# Altium PCB PCB2.PcbDoc (part 2 of 2)
Units mm, origin at the board's own origin, x right, y up, seen from the top; angles counter-clockwise.
Board outline 102 x 102 mm, 2 copper layers (Top Layer, Bottom Layer); 216 components, 12 nets, 485 pads, 0 vias.
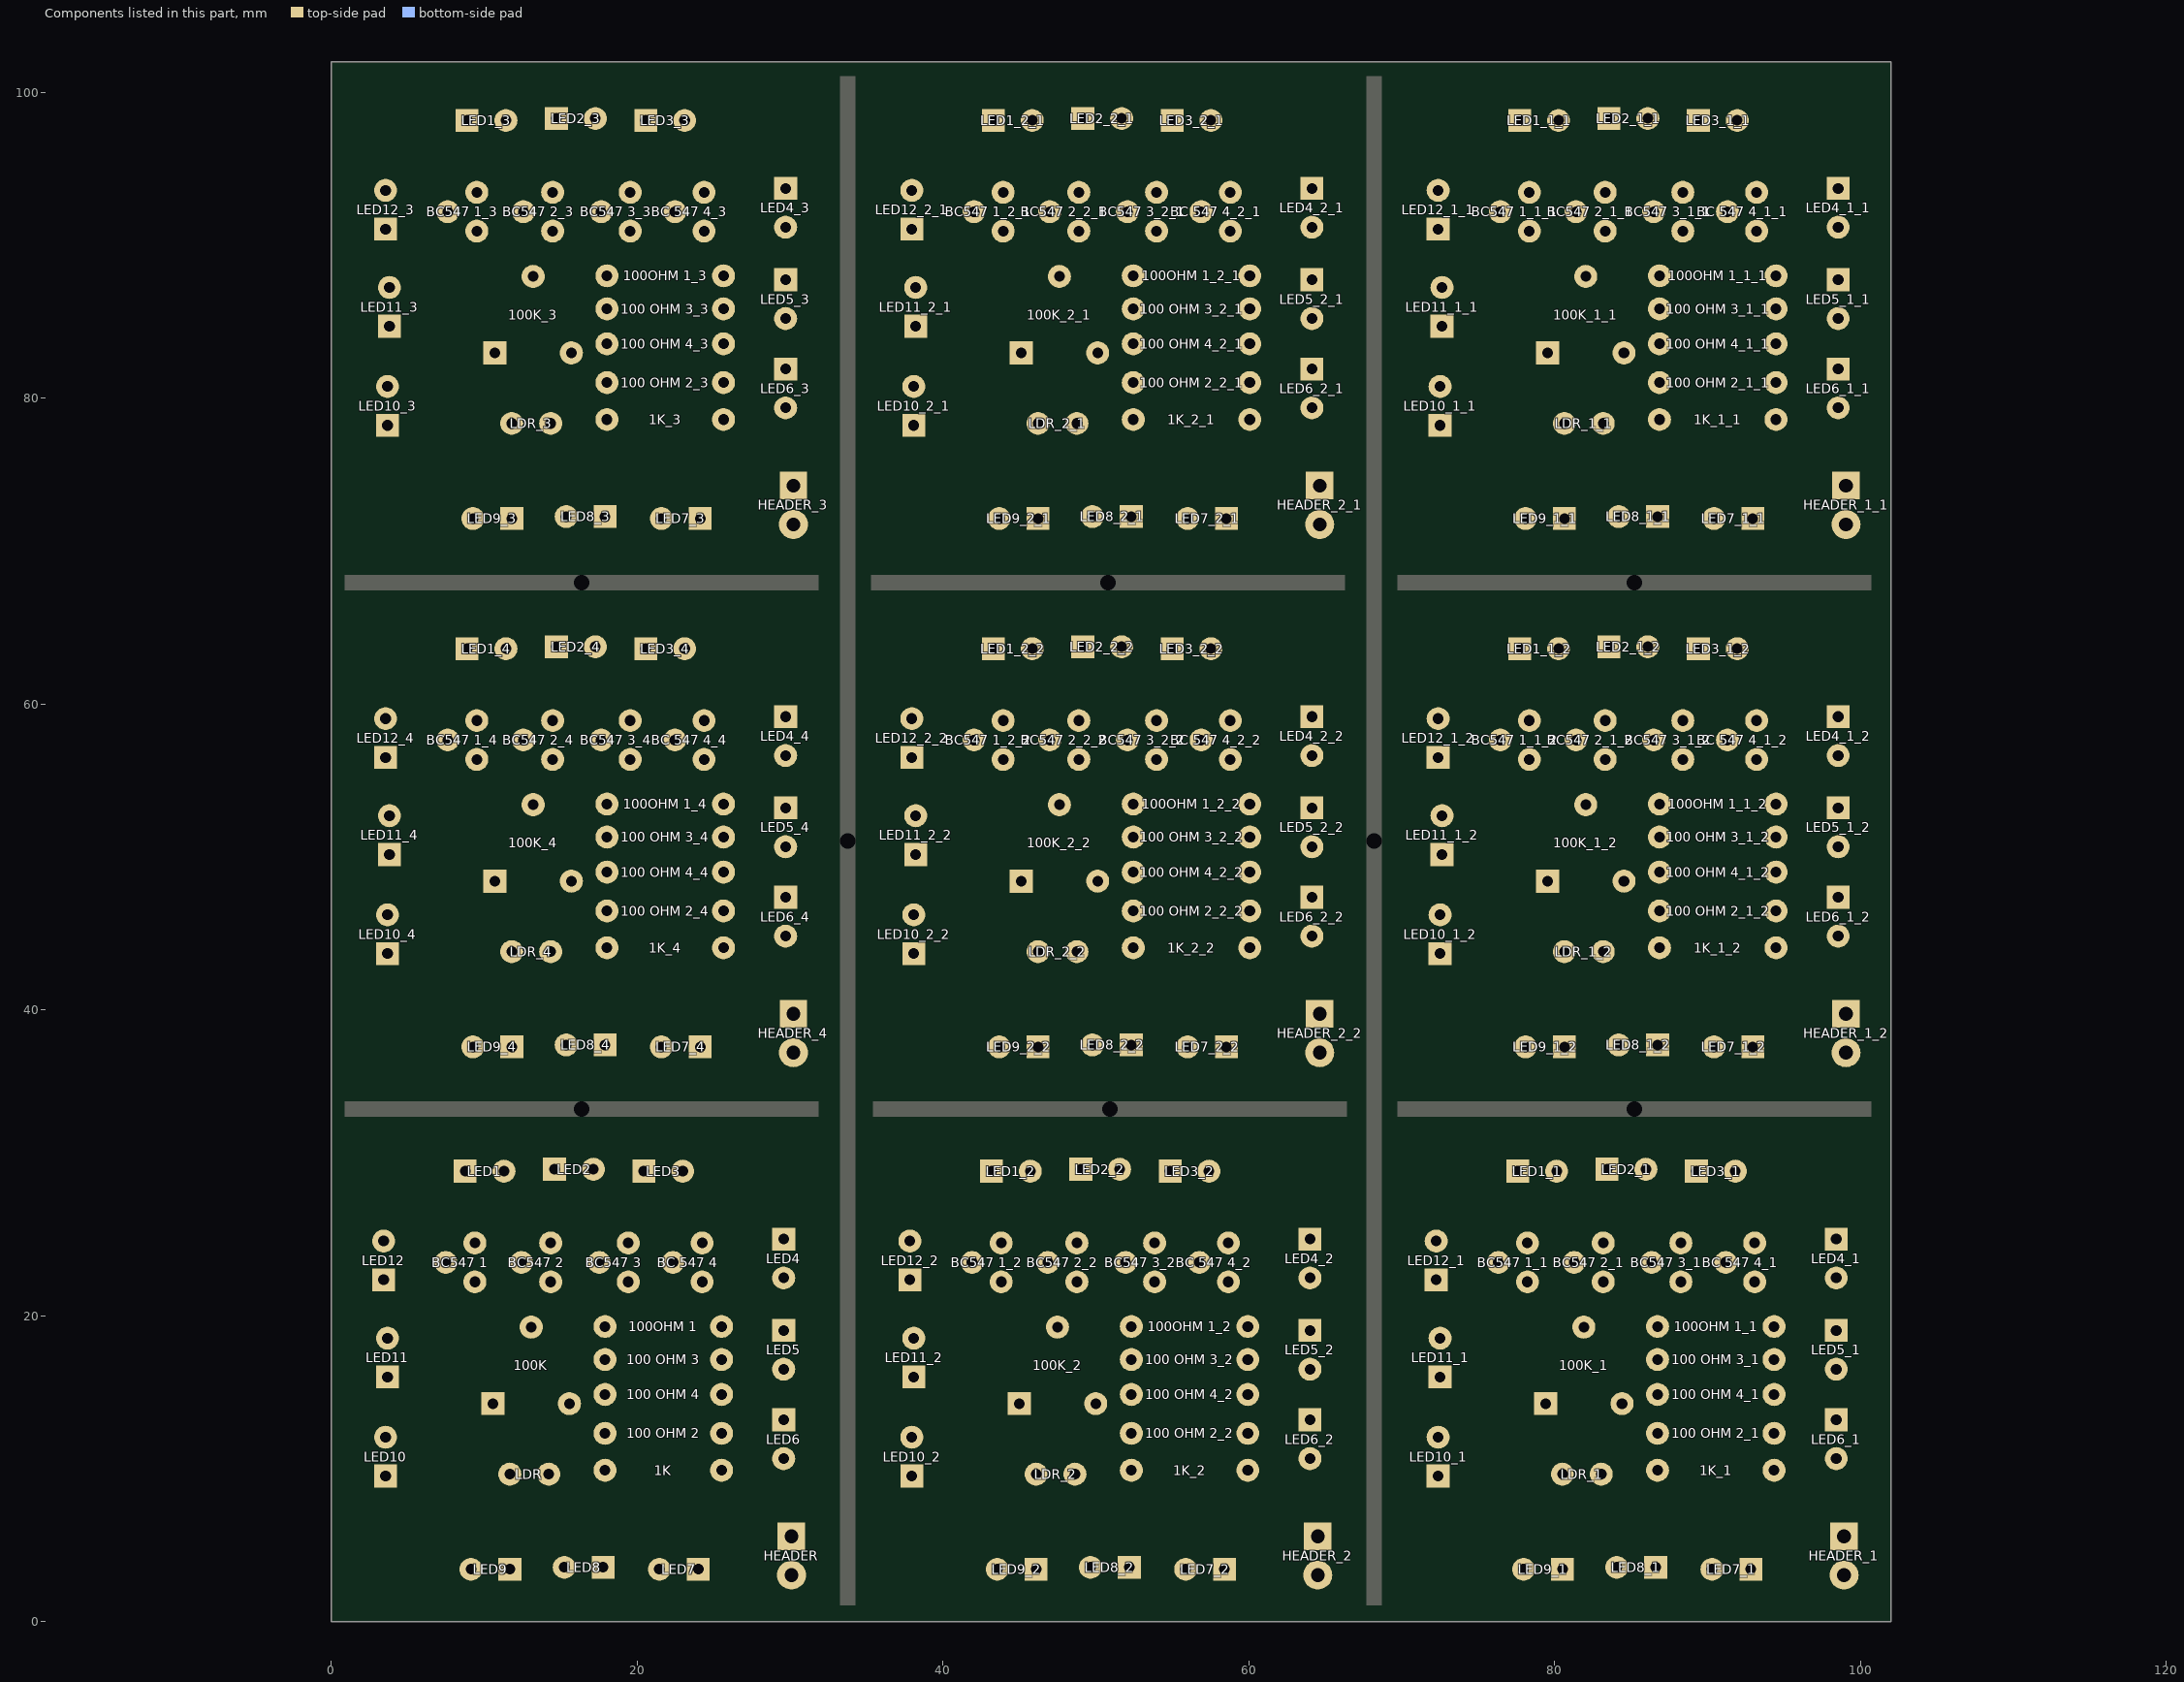
[diagram p2: the components of this part, seen from the top]

## Nets (pads, with @x,y where several pads share a name; then routed paths per layer and width w, separated by ;. In a path a pad name is that pad's centre, name@x,y a point inside that pad or via, vN(x,y) a via of type N, cw(c..) or ccw(c..) an arc to the next point about the centre after c; other vN are vias at no path point) (continued)
copper on no net: | length 3247.5
  Top Layer w0.508: 3.556,56.515 5.182,54.889 5.182,51.537 3.81,50.165 5.055,48.92 5.055,45.06 3.683,43.688 ; 3.556,91.059 5.182,89.433 5.182,86.081 3.81,84.709 5.055,83.464 5.055,79.604 3.683,78.232 ; 3.683,46.228 2.54,47.371 2.54,51.435 3.81,52.705 2.286,54.229 2.286,57.785 3.556,59.055 3.556,63.754 5.334,65.532 24.13,65.532 25.4,64.262 25.4,62.103 24.232,60.935 22.098,60.935 21.209,60.046 21.209,56.896 21.717,56.388 24.384,56.388 ; 3.683,80.772 2.54,81.915 2.54,85.979 3.81,87.249 2.286,88.773 2.286,92.329 3.556,93.599 3.556,98.298 5.334,100.076 24.13,100.076 25.4,98.806 25.4,96.647 24.232,95.479 22.098,95.479 21.209,94.59 21.209,91.44 21.717,90.932 24.384,90.932 ; 9.525,56.388 11.43,58.293 11.43,63.627 ; 9.525,58.928 6.985,58.928 6.35,58.293 6.35,49.276 11.811,43.815 ; 9.525,90.932 11.43,92.837 11.43,98.171 ; 9.525,93.472 6.985,93.472 6.35,92.837 6.35,83.82 11.811,78.359 ; 10.708,48.427 11.129,48.006 11.256,48.006 13.081,46.181 13.081,37.338 14.605,35.814 25.019,35.814 25.654,36.449 25.654,44.069 ; 10.708,82.971 11.129,82.55 11.256,82.55 13.081,80.725 13.081,71.882 14.605,70.358 25.019,70.358 25.654,70.993 25.654,78.613 ; 12.573,57.658 12.573,54.062 13.208,53.427 13.208,50.927 15.708,48.427 15.708,45.172 14.351,43.815 ; 12.573,92.202 12.573,88.606 13.208,87.971 13.208,85.471 15.708,82.971 15.708,79.716 14.351,78.359 ; 18.034,44.069 18.034,46.482 18.034,49.022 18.034,51.308 ; 18.034,53.467 16.383,55.118 16.383,59.436 20.574,63.627 ; 18.034,78.613 18.034,81.026 18.034,83.566 18.034,85.852 ; 18.034,88.011 16.383,89.662 16.383,93.98 20.574,98.171 ; 19.558,56.388 19.558,39.624 21.59,37.592 ; 19.558,90.932 19.558,74.168 21.59,72.136 ; 24.13,37.592 24.13,49.784 25.654,51.308 ; 24.13,72.136 24.13,84.328 25.654,85.852 ; 29.718,44.831 30.988,46.101 30.988,49.403 29.718,50.673 30.988,51.943 30.988,55.372 29.718,56.642 ; 29.718,47.371 28.448,48.641 28.448,51.943 29.718,53.213 28.448,54.483 28.448,57.912 29.718,59.182 ; 29.718,79.375 30.988,80.645 30.988,83.947 29.718,85.217 30.988,86.487 30.988,89.916 29.718,91.186 ; 29.718,81.915 28.448,83.185 28.448,86.487 29.718,87.757 28.448,89.027 28.448,92.456 29.718,93.726 ; 37.846,22.352 39.472,20.726 39.472,17.374 38.1,16.002 39.345,14.757 39.345,10.897 37.973,9.525 ; 37.973,12.065 36.83,13.208 36.83,17.272 38.1,18.542 36.576,20.066 36.576,23.622 37.846,24.892 37.846,29.591 39.624,31.369 58.42,31.369 59.69,30.099 59.69,27.94 58.522,26.772 56.388,26.772 55.499,25.883 55.499,22.733 56.007,22.225 58.674,22.225 ; 37.973,56.515 39.599,54.889 39.599,51.537 38.227,50.165 39.472,48.92 39.472,45.06 38.1,43.688 ; 37.973,91.059 39.599,89.433 39.599,86.081 38.227,84.709 39.472,83.464 39.472,79.604 38.1,78.232 ; 38.1,46.228 36.957,47.371 36.957,51.435 38.227,52.705 36.703,54.229 36.703,57.785 37.973,59.055 37.973,63.754 39.751,65.532 58.547,65.532 59.817,64.262 59.817,62.103 58.649,60.935 56.515,60.935 55.626,60.046 55.626,56.896 56.134,56.388 58.801,56.388 ; 38.1,80.772 36.957,81.915 36.957,85.979 38.227,87.249 36.703,88.773 36.703,92.329 37.973,93.599 37.973,98.298 39.751,100.076 58.547,100.076 59.817,98.806 59.817,96.647 58.649,95.479 56.515,95.479 55.626,94.59 55.626,91.44 56.134,90.932 58.801,90.932 ; 43.815,22.225 45.72,24.13 45.72,29.464 ; 43.815,24.765 41.275,24.765 40.64,24.13 40.64,15.113 46.101,9.652 ; 43.942,56.388 45.847,58.293 45.847,63.627 ; 43.942,58.928 41.402,58.928 40.767,58.293 40.767,49.276 46.228,43.815 ; 43.942,90.932 45.847,92.837 45.847,98.171 ; 43.942,93.472 41.402,93.472 40.767,92.837 40.767,83.82 46.228,78.359 ; 44.998,14.264 45.419,13.843 45.546,13.843 47.371,12.018 47.371,3.175 48.895,1.651 59.309,1.651 59.944,2.286 59.944,9.906 ; 45.125,48.427 45.546,48.006 45.673,48.006 47.498,46.181 47.498,37.338 49.022,35.814 59.436,35.814 60.071,36.449 60.071,44.069 ; 45.125,82.971 45.546,82.55 45.673,82.55 47.498,80.725 47.498,71.882 49.022,70.358 59.436,70.358 60.071,70.993 60.071,78.613 ; 46.863,23.495 46.863,19.899 47.498,19.264 47.498,16.764 49.998,14.264 49.998,11.009 48.641,9.652 ; 46.99,57.658 46.99,54.062 47.625,53.427 47.625,50.927 50.125,48.427 50.125,45.172 48.768,43.815 ; 46.99,92.202 46.99,88.606 47.625,87.971 47.625,85.471 50.125,82.971 50.125,79.716 48.768,78.359 ; 52.324,9.906 52.324,12.319 52.324,14.859 52.324,17.145 ; 52.324,19.304 50.673,20.955 50.673,25.273 54.864,29.464 ; 52.451,44.069 52.451,46.482 52.451,49.022 52.451,51.308 ; 52.451,53.467 50.8,55.118 50.8,59.436 54.991,63.627 ; 52.451,78.613 52.451,81.026 52.451,83.566 52.451,85.852 ; 52.451,88.011 50.8,89.662 50.8,93.98 54.991,98.171 ; 53.848,22.225 53.848,5.461 55.88,3.429 ; 53.975,56.388 53.975,39.624 56.007,37.592 ; 53.975,90.932 53.975,74.168 56.007,72.136 ; 58.42,3.429 58.42,15.621 59.944,17.145 ; 58.547,37.592 58.547,49.784 60.071,51.308 ; 58.547,72.136 58.547,84.328 60.071,85.852 ; 64.008,10.668 65.278,11.938 65.278,15.24 64.008,16.51 65.278,17.78 65.278,21.209 64.008,22.479 ; 64.008,13.208 62.738,14.478 62.738,17.78 64.008,19.05 62.738,20.32 62.738,23.749 64.008,25.019 ; 64.135,44.831 65.405,46.101 65.405,49.403 64.135,50.673 65.405,51.943 65.405,55.372 64.135,56.642 ; 64.135,47.371 62.865,48.641 62.865,51.943 64.135,53.213 62.865,54.483 62.865,57.912 64.135,59.182 ; 64.135,79.375 65.405,80.645 65.405,83.947 64.135,85.217 65.405,86.487 65.405,89.916 64.135,91.186 ; 64.135,81.915 62.865,83.185 62.865,86.487 64.135,87.757 62.865,89.027 62.865,92.456 64.135,93.726 ; 72.263,22.352 73.889,20.726 73.889,17.374 72.517,16.002 73.762,14.757 73.762,10.897 72.39,9.525 ; 72.39,12.065 71.247,13.208 71.247,17.272 72.517,18.542 70.993,20.066 70.993,23.622 72.263,24.892 72.263,29.591 74.041,31.369 92.837,31.369 94.107,30.099 94.107,27.94 92.939,26.772 90.805,26.772 89.916,25.883 89.916,22.733 90.424,22.225 93.091,22.225 ; 72.39,56.515 74.016,54.889 74.016,51.537 72.644,50.165 73.889,48.92 73.889,45.06 72.517,43.688 ; 72.39,91.059 74.016,89.433 74.016,86.081 72.644,84.709 73.889,83.464 73.889,79.604 72.517,78.232 ; 72.517,46.228 71.374,47.371 71.374,51.435 72.644,52.705 71.12,54.229 71.12,57.785 72.39,59.055 72.39,63.754 74.168,65.532 92.964,65.532 94.234,64.262 94.234,62.103 93.066,60.935 90.932,60.935 90.043,60.046 90.043,56.896 90.551,56.388 93.218,56.388 ; 72.517,80.772 71.374,81.915 71.374,85.979 72.644,87.249 71.12,88.773 71.12,92.329 72.39,93.599 72.39,98.298 74.168,100.076 92.964,100.076 94.234,98.806 94.234,96.647 93.066,95.479 90.932,95.479 90.043,94.59 90.043,91.44 90.551,90.932 93.218,90.932 ; 78.232,22.225 80.137,24.13 80.137,29.464 ; 78.232,24.765 75.692,24.765 75.057,24.13 75.057,15.113 80.518,9.652 ; 78.359,56.388 80.264,58.293 80.264,63.627 ; 78.359,58.928 75.819,58.928 75.184,58.293 75.184,49.276 80.645,43.815 ; 78.359,90.932 80.264,92.837 80.264,98.171 ; 78.359,93.472 75.819,93.472 75.184,92.837 75.184,83.82 80.645,78.359 ; 79.415,14.264 79.836,13.843 79.963,13.843 81.788,12.018 81.788,3.175 83.312,1.651 93.726,1.651 94.361,2.286 94.361,9.906 ; 79.542,48.427 79.963,48.006 80.09,48.006 81.915,46.181 81.915,37.338 83.439,35.814 93.853,35.814 94.488,36.449 94.488,44.069 ; 79.542,82.971 79.963,82.55 80.09,82.55 81.915,80.725 81.915,71.882 83.439,70.358 93.853,70.358 94.488,70.993 94.488,78.613 ; 81.28,23.495 81.28,19.899 81.915,19.264 81.915,16.764 84.415,14.264 84.415,11.009 83.058,9.652 ; 81.407,57.658 81.407,54.062 82.042,53.427 82.042,50.927 84.542,48.427 84.542,45.172 83.185,43.815 ; 81.407,92.202 81.407,88.606 82.042,87.971 82.042,85.471 84.542,82.971 84.542,79.716 83.185,78.359 ; 86.741,9.906 86.741,12.319 86.741,14.859 86.741,17.145 ; 86.741,19.304 85.09,20.955 85.09,25.273 89.281,29.464 ; 86.868,44.069 86.868,46.482 86.868,49.022 86.868,51.308 ; 86.868,53.467 85.217,55.118 85.217,59.436 89.408,63.627 ; 86.868,78.613 86.868,81.026 86.868,83.566 86.868,85.852 ; 86.868,88.011 85.217,89.662 85.217,93.98 89.408,98.171 ; 88.265,22.225 88.265,5.461 90.297,3.429 ; 88.392,56.388 88.392,39.624 90.424,37.592 ; 88.392,90.932 88.392,74.168 90.424,72.136 ; 92.837,3.429 92.837,15.621 94.361,17.145 ; 92.964,37.592 92.964,49.784 94.488,51.308 ; 92.964,72.136 92.964,84.328 94.488,85.852 ; 98.425,10.668 99.695,11.938 99.695,15.24 98.425,16.51 99.695,17.78 99.695,21.209 98.425,22.479 ; 98.425,13.208 97.155,14.478 97.155,17.78 98.425,19.05 97.155,20.32 97.155,23.749 98.425,25.019 ; 98.552,44.831 99.822,46.101 99.822,49.403 98.552,50.673 99.822,51.943 99.822,55.372 98.552,56.642 ; 98.552,47.371 97.282,48.641 97.282,51.943 98.552,53.213 97.282,54.483 97.282,57.912 98.552,59.182 ; 98.552,79.375 99.822,80.645 99.822,83.947 98.552,85.217 99.822,86.487 99.822,89.916 98.552,91.186 ; 98.552,81.915 97.282,83.185 97.282,86.487 98.552,87.757 97.282,89.027 97.282,92.456 98.552,93.726
  Bottom Layer w0.508: 3.81,50.165 6.833,47.142 16.915,47.142 17.525,47.752 24.384,47.752 25.654,49.022 ; 3.81,84.709 6.833,81.686 16.915,81.686 17.525,82.296 24.384,82.296 25.654,83.566 ; 7.62,57.658 12.573,57.658 17.653,57.658 22.479,57.658 ; 7.62,92.202 12.573,92.202 17.653,92.202 22.479,92.202 ; 8.89,63.627 10.262,62.255 13.233,62.255 14.732,63.754 16.104,62.382 19.329,62.382 20.574,63.627 ; 8.89,98.171 10.262,96.799 13.233,96.799 14.732,98.298 16.104,96.926 19.329,96.926 20.574,98.171 ; 9.271,37.592 10.541,36.322 13.97,36.322 15.367,37.719 17.272,35.814 19.812,35.814 21.59,37.592 ; 9.271,72.136 10.541,70.866 13.97,70.866 15.367,72.263 17.272,70.358 19.812,70.358 21.59,72.136 ; 9.525,58.928 14.478,58.928 19.558,58.928 24.384,58.928 ; 9.525,93.472 14.478,93.472 19.558,93.472 24.384,93.472 ; 11.43,63.627 12.903,65.1 15.926,65.1 17.272,63.754 18.491,64.973 21.768,64.973 23.114,63.627 ; 11.43,98.171 12.903,99.644 15.926,99.644 17.272,98.298 18.491,99.517 21.768,99.517 23.114,98.171 ; 11.811,37.592 13.31,39.091 16.535,39.091 17.907,37.719 19.152,38.964 22.758,38.964 24.13,37.592 ; 11.811,43.815 15.367,40.259 27.178,40.259 30.226,37.211 ; 11.811,72.136 13.31,73.635 16.535,73.635 17.907,72.263 19.152,73.508 22.758,73.508 24.13,72.136 ; 11.811,78.359 15.367,74.803 27.178,74.803 30.226,71.755 ; 14.478,56.388 15.748,55.118 28.194,55.118 29.718,56.642 ; 14.478,90.932 15.748,89.662 28.194,89.662 29.718,91.186 ; 18.034,44.069 20.549,41.554 28.423,41.554 30.226,39.751 ; 18.034,51.308 20.193,53.467 25.654,53.467 ; 18.034,78.613 20.549,76.098 28.423,76.098 30.226,74.295 ; 18.034,85.852 20.193,88.011 25.654,88.011 ; 25.654,46.482 26.543,47.371 29.718,47.371 ; 25.654,81.026 26.543,81.915 29.718,81.915 ; 38.1,16.002 41.123,12.979 51.205,12.979 51.815,13.589 58.674,13.589 59.944,14.859 ; 38.227,50.165 41.25,47.142 51.332,47.142 51.942,47.752 58.801,47.752 60.071,49.022 ; 38.227,84.709 41.25,81.686 51.332,81.686 51.942,82.296 58.801,82.296 60.071,83.566 ; 41.91,23.495 46.863,23.495 51.943,23.495 56.769,23.495 ; 42.037,57.658 46.99,57.658 52.07,57.658 56.896,57.658 ; 42.037,92.202 46.99,92.202 52.07,92.202 56.896,92.202 ; 43.18,29.464 44.552,28.092 47.523,28.092 49.022,29.591 50.394,28.219 53.619,28.219 54.864,29.464 ; 43.307,63.627 44.679,62.255 47.65,62.255 49.149,63.754 50.521,62.382 53.746,62.382 54.991,63.627 ; 43.307,98.171 44.679,96.799 47.65,96.799 49.149,98.298 50.521,96.926 53.746,96.926 54.991,98.171 ; 43.561,3.429 44.831,2.159 48.26,2.159 49.657,3.556 51.562,1.651 54.102,1.651 55.88,3.429 ; 43.688,37.592 44.958,36.322 48.387,36.322 49.784,37.719 51.689,35.814 54.229,35.814 56.007,37.592 ; 43.688,72.136 44.958,70.866 48.387,70.866 49.784,72.263 51.689,70.358 54.229,70.358 56.007,72.136 ; 43.815,24.765 48.768,24.765 53.848,24.765 58.674,24.765 ; 43.942,58.928 48.895,58.928 53.975,58.928 58.801,58.928 ; 43.942,93.472 48.895,93.472 53.975,93.472 58.801,93.472 ; 45.72,29.464 47.193,30.937 50.216,30.937 51.562,29.591 52.781,30.81 56.058,30.81 57.404,29.464 ; 45.847,63.627 47.32,65.1 50.343,65.1 51.689,63.754 52.908,64.973 56.185,64.973 57.531,63.627 ; 45.847,98.171 47.32,99.644 50.343,99.644 51.689,98.298 52.908,99.517 56.185,99.517 57.531,98.171 ; 46.101,3.429 47.6,4.928 50.825,4.928 52.197,3.556 53.442,4.801 57.048,4.801 58.42,3.429 ; 46.101,9.652 49.657,6.096 61.468,6.096 64.516,3.048 ; 46.228,37.592 47.727,39.091 50.952,39.091 52.324,37.719 53.569,38.964 57.175,38.964 58.547,37.592 ; 46.228,43.815 49.784,40.259 61.595,40.259 64.643,37.211 ; 46.228,72.136 47.727,73.635 50.952,73.635 52.324,72.263 53.569,73.508 57.175,73.508 58.547,72.136 ; 46.228,78.359 49.784,74.803 61.595,74.803 64.643,71.755 ; 48.768,22.225 50.038,20.955 62.484,20.955 64.008,22.479 ; 48.895,56.388 50.165,55.118 62.611,55.118 64.135,56.642 ; 48.895,90.932 50.165,89.662 62.611,89.662 64.135,91.186 ; 52.324,9.906 54.839,7.391 62.713,7.391 64.516,5.588 ; 52.324,17.145 54.483,19.304 59.944,19.304 ; 52.451,44.069 54.966,41.554 62.84,41.554 64.643,39.751 ; 52.451,51.308 54.61,53.467 60.071,53.467 ; 52.451,78.613 54.966,76.098 62.84,76.098 64.643,74.295 ; 52.451,85.852 54.61,88.011 60.071,88.011 ; 59.944,12.319 60.833,13.208 64.008,13.208 ; 60.071,46.482 60.96,47.371 64.135,47.371 ; 60.071,81.026 60.96,81.915 64.135,81.915 ; 72.517,16.002 75.54,12.979 85.622,12.979 86.232,13.589 93.091,13.589 94.361,14.859 ; 72.644,50.165 75.667,47.142 85.749,47.142 86.359,47.752 93.218,47.752 94.488,49.022 ; 72.644,84.709 75.667,81.686 85.749,81.686 86.359,82.296 93.218,82.296 94.488,83.566 ; 76.327,23.495 81.28,23.495 86.36,23.495 91.186,23.495 ; 76.454,57.658 81.407,57.658 86.487,57.658 91.313,57.658 ; 76.454,92.202 81.407,92.202 86.487,92.202 91.313,92.202 ; 77.597,29.464 78.969,28.092 81.94,28.092 83.439,29.591 84.811,28.219 88.036,28.219 89.281,29.464 ; 77.724,63.627 79.096,62.255 82.067,62.255 83.566,63.754 84.938,62.382 88.163,62.382 89.408,63.627 ; 77.724,98.171 79.096,96.799 82.067,96.799 83.566,98.298 84.938,96.926 88.163,96.926 89.408,98.171 ; 77.978,3.429 79.248,2.159 82.677,2.159 84.074,3.556 85.979,1.651 88.519,1.651 90.297,3.429 ; 78.105,37.592 79.375,36.322 82.804,36.322 84.201,37.719 86.106,35.814 88.646,35.814 90.424,37.592 ; 78.105,72.136 79.375,70.866 82.804,70.866 84.201,72.263 86.106,70.358 88.646,70.358 90.424,72.136 ; 78.232,24.765 83.185,24.765 88.265,24.765 93.091,24.765 ; 78.359,58.928 83.312,58.928 88.392,58.928 93.218,58.928 ; 78.359,93.472 83.312,93.472 88.392,93.472 93.218,93.472 ; 80.137,29.464 81.61,30.937 84.633,30.937 85.979,29.591 87.198,30.81 90.475,30.81 91.821,29.464 ; 80.264,63.627 81.737,65.1 84.76,65.1 86.106,63.754 87.325,64.973 90.602,64.973 91.948,63.627 ; 80.264,98.171 81.737,99.644 84.76,99.644 86.106,98.298 87.325,99.517 90.602,99.517 91.948,98.171 ; 80.518,3.429 82.017,4.928 85.242,4.928 86.614,3.556 87.859,4.801 91.465,4.801 92.837,3.429 ; 80.518,9.652 84.074,6.096 95.885,6.096 98.933,3.048 ; 80.645,37.592 82.144,39.091 85.369,39.091 86.741,37.719 87.986,38.964 91.592,38.964 92.964,37.592 ; 80.645,43.815 84.201,40.259 96.012,40.259 99.06,37.211 ; 80.645,72.136 82.144,73.635 85.369,73.635 86.741,72.263 87.986,73.508 91.592,73.508 92.964,72.136 ; 80.645,78.359 84.201,74.803 96.012,74.803 99.06,71.755 ; 83.185,22.225 84.455,20.955 96.901,20.955 98.425,22.479 ; 83.312,56.388 84.582,55.118 97.028,55.118 98.552,56.642 ; 83.312,90.932 84.582,89.662 97.028,89.662 98.552,91.186 ; 86.741,9.906 89.256,7.391 97.13,7.391 98.933,5.588 ; 86.741,17.145 88.9,19.304 94.361,19.304 ; 86.868,44.069 89.383,41.554 97.257,41.554 99.06,39.751 ; 86.868,51.308 89.027,53.467 94.488,53.467 ; 86.868,78.613 89.383,76.098 97.257,76.098 99.06,74.295 ; 86.868,85.852 89.027,88.011 94.488,88.011 ; 94.361,12.319 95.25,13.208 98.425,13.208 ; 94.488,46.482 95.377,47.371 98.552,47.371 ; 94.488,81.026 95.377,81.915 98.552,81.915

## Keep-outs
Keep-Out Layer:
  the board outline again, w0.254

## Silkscreen, mask and mechanical layers (free items; w line width, h text height)
Top Overlay:
  lines w0.254: 7.874,11.049 9.906,9.017 ; 8.001,13.462 10.287,11.176 ; 8.001,45.212 10.033,43.18 ; 8.001,79.756 10.033,77.724 ; 8.128,47.625 10.414,45.339 ; 8.128,82.169 10.414,79.883 ; 9.017,9.017 9.906,9.017 ; 9.144,11.176 10.287,11.176 ; 9.144,43.18 10.033,43.18 ; 9.144,77.724 10.033,77.724 ; 9.271,45.339 10.414,45.339 ; 9.271,79.883 10.414,79.883 ; 9.906,10.033 9.906,9.017 ; 10.033,44.196 10.033,43.18 ; 10.033,78.74 10.033,77.724 ; 10.287,12.192 10.287,11.176 ; 10.414,46.355 10.414,45.339 ; 10.414,80.899 10.414,79.883 ; 42.291,11.049 44.323,9.017 ; 42.418,13.462 44.704,11.176 ; 42.418,45.212 44.45,43.18 ; 42.418,79.756 44.45,77.724 ; 42.545,47.625 44.831,45.339 ; 42.545,82.169 44.831,79.883 ; 43.434,9.017 44.323,9.017 ; 43.561,11.176 44.704,11.176 ; 43.561,43.18 44.45,43.18 ; 43.561,77.724 44.45,77.724 ; 43.688,45.339 44.831,45.339 ; 43.688,79.883 44.831,79.883 ; 44.323,10.033 44.323,9.017 ; 44.45,44.196 44.45,43.18 ; 44.45,78.74 44.45,77.724 ; 44.704,12.192 44.704,11.176 ; 44.831,46.355 44.831,45.339 ; 44.831,80.899 44.831,79.883 ; 76.708,11.049 78.74,9.017 ; 76.835,13.462 79.121,11.176 ; 76.835,45.212 78.867,43.18 ; 76.835,79.756 78.867,77.724 ; 76.962,47.625 79.248,45.339 ; 76.962,82.169 79.248,79.883 ; 77.851,9.017 78.74,9.017 ; 77.978,11.176 79.121,11.176 ; 77.978,43.18 78.867,43.18 ; 77.978,77.724 78.867,77.724 ; 78.105,45.339 79.248,45.339 ; 78.105,79.883 79.248,79.883 ; 78.74,10.033 78.74,9.017 ; 78.867,44.196 78.867,43.18 ; 78.867,78.74 78.867,77.724 ; 79.121,12.192 79.121,11.176 ; 79.248,46.355 79.248,45.339 ; 79.248,80.899 79.248,79.883 ; 0.381,0.381 0.381,32.639 32.639,32.639 32.639,0.381 0.381,0.381 ; 0.508,34.544 32.766,34.544 32.766,66.802 0.508,66.802 0.508,34.544 ; 0.508,69.088 32.766,69.088 32.766,101.346 0.508,101.346 0.508,69.088 ; 34.798,0.381 67.056,0.381 67.056,32.639 34.798,32.639 34.798,0.381 ; 34.925,34.544 34.925,66.802 67.183,66.802 67.183,34.544 34.925,34.544 ; 34.925,69.088 34.925,101.346 67.183,101.346 67.183,69.088 34.925,69.088 ; 69.215,0.381 101.473,0.381 101.473,32.639 69.215,32.639 69.215,0.381 ; 69.342,34.544 69.342,66.802 101.6,66.802 101.6,34.544 69.342,34.544 ; 69.342,69.088 69.342,101.346 101.6,101.346 101.6,69.088 69.342,69.088
  text "+" at 14.224,99.06 h1.52
  text "+" at 20.193,99.06 h1.52
  text "+" at 48.641,99.06 h1.52
  text "+" at 54.61,99.06 h1.52
  text "+" at 83.058,99.06 h1.52
  text "+" at 89.027,99.06 h1.52
  text "+" at 8.382,98.933 h1.52
  text "+" at 42.799,98.933 h1.52
  text "+" at 77.216,98.933 h1.52
  text "-" at 10.795,98.679 h1.52
  text "-" at 16.764,98.679 h1.52
  text "-" at 22.479,98.679 h1.52
  text "-" at 45.212,98.679 h1.52
  text "-" at 51.181,98.679 h1.52
  text "-" at 56.896,98.679 h1.52
  text "-" at 79.629,98.679 h1.52
  text "-" at 85.598,98.679 h1.52
  text "-" at 91.313,98.679 h1.52
  text "12 / LEDs" at 1.27,95.504 h1.5
  text "12 / LEDs" at 35.687,95.504 h1.5
  text "12 / LEDs" at 70.104,95.504 h1.5
  text "DARK / SENSITIVE / CIRCUIT" at 22.098,94.742 h0.9
  text "DARK / SENSITIVE / CIRCUIT" at 56.515,94.742 h0.9
  text "DARK / SENSITIVE / CIRCUIT" at 90.932,94.742 h0.9
  text "+" at 30.734,92.837 h1.52
  text "+" at 65.151,92.837 h1.52
  text "+" at 99.568,92.837 h1.52
  text "-" at 1.524,92.456 h1.52
  text "-" at 35.941,92.456 h1.52
  text "-" at 70.358,92.456 h1.52
  text "BC547" at 11.049,90.678 h0.7 r90
  text "BC547" at 16.002,90.678 h0.7 r90
  text "BC547" at 21.082,90.678 h0.7 r90
  text "BC547" at 25.908,90.678 h0.7 r90
  text "BC547" at 45.466,90.678 h0.7 r90
  text "BC547" at 50.419,90.678 h0.7 r90
  text "BC547" at 55.499,90.678 h0.7 r90
  text "BC547" at 60.325,90.678 h0.7 r90
  text "BC547" at 79.883,90.678 h0.7 r90
  text "BC547" at 84.836,90.678 h0.7 r90
  text "BC547" at 89.916,90.678 h0.7 r90
  text "BC547" at 94.742,90.678 h0.7 r90
  text "-" at 30.861,90.551 h1.52
  text "-" at 65.278,90.551 h1.52
  text "-" at 99.695,90.551 h1.52
  text "+" at 1.524,90.424 h1.52
  text "+" at 35.941,90.424 h1.52
  text "+" at 70.358,90.424 h1.52
  text "100" at 20.32,87.503 h1
  text "100" at 54.737,87.503 h1
  text "100" at 89.154,87.503 h1
  text "+" at 30.734,86.868 h1.52
  text "+" at 65.151,86.868 h1.52
  text "+" at 99.568,86.868 h1.52
  text "-" at 1.778,86.106 h1.52
  text "-" at 36.195,86.106 h1.52
  text "-" at 70.612,86.106 h1.52
  text "100" at 20.32,85.344 h1
  text "100" at 54.737,85.344 h1
  text "100" at 89.154,85.344 h1
  text "100K" at 10.668,84.963 h1.5
  text "100K" at 45.085,84.963 h1.5
  text "100K" at 79.502,84.963 h1.5
  text "-" at 30.734,84.582 h1.52
  text "-" at 65.151,84.582 h1.52
  text "-" at 99.568,84.582 h1.52
  text "+" at 1.651,84.328 h1.52
  text "+" at 36.068,84.328 h1.52
  text "+" at 70.485,84.328 h1.52
  text "100" at 20.32,83.058 h1
  text "100" at 54.737,83.058 h1
  text "100" at 89.154,83.058 h1
  text "+" at 30.734,81.026 h1.52
  text "+" at 65.151,81.026 h1.52
  text "+" at 99.568,81.026 h1.52
  text "100" at 20.32,80.518 h1
  text "100" at 54.737,80.518 h1
  text "100" at 89.154,80.518 h1
  text "-" at 1.651,79.756 h1.52
  text "-" at 36.068,79.756 h1.52
  text "-" at 70.485,79.756 h1.52
  text "LDR" at 11.938,79.248 h1.1
  text "LDR" at 46.355,79.248 h1.1
  text "LDR" at 80.772,79.248 h1.1
  text "-" at 30.734,78.613 h1.52
  text "-" at 65.151,78.613 h1.52
  text "-" at 99.568,78.613 h1.52
  text "1k" at 21.209,78.105 h1
  text "1k" at 55.626,78.105 h1
  text "1k" at 90.043,78.105 h1
  text "+" at 1.651,77.724 h1.52
  text "+" at 36.068,77.724 h1.52
  text "+" at 70.485,77.724 h1.52
  text "7mm LDR" at 11.684,76.2 h1
  text "7mm LDR" at 46.101,76.2 h1
  text "7mm LDR" at 80.518,76.2 h1
  text "+" at 29.718,75.692 h1.52
  text "+" at 64.135,75.692 h1.52
  text "+" at 98.552,75.692 h1.52
  text "A.I. PCB" at 1.27,74.93 h1.2
  text "A.I. PCB" at 35.687,74.93 h1.2
  text "A.I. PCB" at 70.104,74.93 h1.2
  text "9V" at 28.194,71.374 h1.52 r90
  text "9V" at 62.611,71.374 h1.52 r90
  text "9V" at 97.028,71.374 h1.52 r90
  text "-" at 14.859,70.231 h1.52
  text "-" at 49.276,70.231 h1.52
  text "-" at 83.693,70.231 h1.52
  text "-" at 8.763,70.104 h1.52
  text "-" at 43.18,70.104 h1.52
  text "-" at 77.597,70.104 h1.52
  text "-" at 21.209,69.977 h1.52
  text "-" at 55.626,69.977 h1.52
  text "-" at 90.043,69.977 h1.52
  text "+" at 11.049,69.85 h1.52
  text "+" at 17.145,69.85 h1.52
  text "+" at 23.368,69.85 h1.52
  text "+" at 45.466,69.85 h1.52
  text "+" at 51.562,69.85 h1.52
  text "+" at 57.785,69.85 h1.52
  text "+" at 79.883,69.85 h1.52
  text "+" at 85.979,69.85 h1.52
  text "+" at 92.202,69.85 h1.52
  text "-" at 29.845,69.088 h1.52
  text "-" at 64.262,69.088 h1.52
  text "-" at 98.679,69.088 h1.52
  text "+" at 14.224,64.516 h1.52
  text "+" at 20.193,64.516 h1.52
  text "+" at 48.641,64.516 h1.52
  text "+" at 54.61,64.516 h1.52
  text "+" at 83.058,64.516 h1.52
  text "+" at 89.027,64.516 h1.52
  text "+" at 8.382,64.389 h1.52
  text "+" at 42.799,64.389 h1.52
  text "+" at 77.216,64.389 h1.52
  text "-" at 10.795,64.135 h1.52
  text "-" at 16.764,64.135 h1.52
  text "-" at 22.479,64.135 h1.52
  text "-" at 45.212,64.135 h1.52
  text "-" at 51.181,64.135 h1.52
  text "-" at 56.896,64.135 h1.52
  text "-" at 79.629,64.135 h1.52
  text "-" at 85.598,64.135 h1.52
  text "-" at 91.313,64.135 h1.52
  text "12 / LEDs" at 1.27,60.96 h1.5
  text "12 / LEDs" at 35.687,60.96 h1.5
  text "12 / LEDs" at 70.104,60.96 h1.5
  text "DARK / SENSITIVE / CIRCUIT" at 22.098,60.198 h0.9
  text "DARK / SENSITIVE / CIRCUIT" at 56.515,60.198 h0.9
  text "DARK / SENSITIVE / CIRCUIT" at 90.932,60.198 h0.9
  text "+" at 30.734,58.293 h1.52
  text "+" at 65.151,58.293 h1.52
  text "+" at 99.568,58.293 h1.52
  text "-" at 1.524,57.912 h1.52
  text "-" at 35.941,57.912 h1.52
  text "-" at 70.358,57.912 h1.52
  text "BC547" at 11.049,56.134 h0.7 r90
  text "BC547" at 16.002,56.134 h0.7 r90
  text "BC547" at 21.082,56.134 h0.7 r90
  text "BC547" at 25.908,56.134 h0.7 r90
  text "BC547" at 45.466,56.134 h0.7 r90
  text "BC547" at 50.419,56.134 h0.7 r90
  text "BC547" at 55.499,56.134 h0.7 r90
  text "BC547" at 60.325,56.134 h0.7 r90
  text "BC547" at 79.883,56.134 h0.7 r90
  text "BC547" at 84.836,56.134 h0.7 r90
  text "BC547" at 89.916,56.134 h0.7 r90
  text "BC547" at 94.742,56.134 h0.7 r90
  text "-" at 30.861,56.007 h1.52
  text "-" at 65.278,56.007 h1.52
  text "-" at 99.695,56.007 h1.52
  text "+" at 1.524,55.88 h1.52
  text "+" at 35.941,55.88 h1.52
  text "+" at 70.358,55.88 h1.52
  text "100" at 20.32,52.959 h1
  text "100" at 54.737,52.959 h1
  text "100" at 89.154,52.959 h1
  text "+" at 30.734,52.324 h1.52
  text "+" at 65.151,52.324 h1.52
  text "+" at 99.568,52.324 h1.52
  text "-" at 1.778,51.562 h1.52
  text "-" at 36.195,51.562 h1.52
  text "-" at 70.612,51.562 h1.52
  text "100" at 20.32,50.8 h1
  text "100" at 54.737,50.8 h1
  text "100" at 89.154,50.8 h1
  text "100K" at 10.668,50.419 h1.5
  text "100K" at 45.085,50.419 h1.5
  text "100K" at 79.502,50.419 h1.5
  text "-" at 30.734,50.038 h1.52
  text "-" at 65.151,50.038 h1.52
  text "-" at 99.568,50.038 h1.52
  text "+" at 1.651,49.784 h1.52
  text "+" at 36.068,49.784 h1.52
  text "+" at 70.485,49.784 h1.52
  text "100" at 20.32,48.514 h1
  text "100" at 54.737,48.514 h1
  text "100" at 89.154,48.514 h1
  text "+" at 30.734,46.482 h1.52
  text "+" at 65.151,46.482 h1.52
  text "+" at 99.568,46.482 h1.52
  text "100" at 20.32,45.974 h1
  text "100" at 54.737,45.974 h1
  text "100" at 89.154,45.974 h1
  text "-" at 1.651,45.212 h1.52
  text "-" at 36.068,45.212 h1.52
  text "-" at 70.485,45.212 h1.52
  text "LDR" at 11.938,44.704 h1.1
  text "LDR" at 46.355,44.704 h1.1
  text "LDR" at 80.772,44.704 h1.1
  text "-" at 30.734,44.069 h1.52
  text "-" at 65.151,44.069 h1.52
  text "-" at 99.568,44.069 h1.52
  text "1k" at 21.209,43.561 h1
  text "1k" at 55.626,43.561 h1
  text "1k" at 90.043,43.561 h1
  text "+" at 1.651,43.18 h1.52
  text "+" at 36.068,43.18 h1.52
  text "+" at 70.485,43.18 h1.52
  text "7mm LDR" at 11.684,41.656 h1
  text "7mm LDR" at 46.101,41.656 h1
  text "7mm LDR" at 80.518,41.656 h1
  text "+" at 29.718,41.148 h1.52
  text "+" at 64.135,41.148 h1.52
  text "+" at 98.552,41.148 h1.52
  text "A.I. PCB" at 1.27,40.386 h1.2
  text "A.I. PCB" at 35.687,40.386 h1.2
  text "A.I. PCB" at 70.104,40.386 h1.2
  text "9V" at 28.194,36.83 h1.52 r90
  text "9V" at 62.611,36.83 h1.52 r90
  text "9V" at 97.028,36.83 h1.52 r90
  text "-" at 14.859,35.687 h1.52
  text "-" at 49.276,35.687 h1.52
  text "-" at 83.693,35.687 h1.52
  text "-" at 8.763,35.56 h1.52
  text "-" at 43.18,35.56 h1.52
  text "-" at 77.597,35.56 h1.52
  text "-" at 21.209,35.433 h1.52
  text "-" at 55.626,35.433 h1.52
  text "-" at 90.043,35.433 h1.52
  text "+" at 11.049,35.306 h1.52
  text "+" at 17.145,35.306 h1.52
  text "+" at 23.368,35.306 h1.52
  text "+" at 45.466,35.306 h1.52
  text "+" at 51.562,35.306 h1.52
  text "+" at 57.785,35.306 h1.52
  text "+" at 79.883,35.306 h1.52
  text "+" at 85.979,35.306 h1.52
  text "+" at 92.202,35.306 h1.52
  text "-" at 29.845,34.544 h1.52
  text "-" at 64.262,34.544 h1.52
  text "-" at 98.679,34.544 h1.52
  text "+" at 14.097,30.353 h1.52
  text "+" at 20.066,30.353 h1.52
  text "+" at 48.514,30.353 h1.52
  text "+" at 54.483,30.353 h1.52
  text "+" at 82.931,30.353 h1.52
  text "+" at 88.9,30.353 h1.52
  text "+" at 8.255,30.226 h1.52
  text "+" at 42.672,30.226 h1.52
  text "+" at 77.089,30.226 h1.52
  text "-" at 10.668,29.972 h1.52
  text "-" at 16.637,29.972 h1.52
  text "-" at 22.352,29.972 h1.52
  text "-" at 45.085,29.972 h1.52
  text "-" at 51.054,29.972 h1.52
  text "-" at 56.769,29.972 h1.52
  text "-" at 79.502,29.972 h1.52
  text "-" at 85.471,29.972 h1.52
  text "-" at 91.186,29.972 h1.52
  text "12 / LEDs" at 1.143,26.797 h1.5
  text "12 / LEDs" at 35.56,26.797 h1.5
  text "12 / LEDs" at 69.977,26.797 h1.5
  text "DARK / SENSITIVE / CIRCUIT" at 21.971,26.035 h0.9
  text "DARK / SENSITIVE / CIRCUIT" at 56.388,26.035 h0.9
  text "DARK / SENSITIVE / CIRCUIT" at 90.805,26.035 h0.9
  text "+" at 30.607,24.13 h1.52
  text "+" at 65.024,24.13 h1.52
  text "+" at 99.441,24.13 h1.52
  text "-" at 1.397,23.749 h1.52
  text "-" at 35.814,23.749 h1.52
  text "-" at 70.231,23.749 h1.52
  text "BC547" at 10.922,21.971 h0.7 r90
  text "BC547" at 15.875,21.971 h0.7 r90
  text "BC547" at 20.955,21.971 h0.7 r90
  text "BC547" at 25.781,21.971 h0.7 r90
  text "BC547" at 45.339,21.971 h0.7 r90
  text "BC547" at 50.292,21.971 h0.7 r90
  text "BC547" at 55.372,21.971 h0.7 r90
  text "BC547" at 60.198,21.971 h0.7 r90
  text "BC547" at 79.756,21.971 h0.7 r90
  text "BC547" at 84.709,21.971 h0.7 r90
  text "BC547" at 89.789,21.971 h0.7 r90
  text "BC547" at 94.615,21.971 h0.7 r90
  text "-" at 30.734,21.844 h1.52
  text "-" at 65.151,21.844 h1.52
  text "-" at 99.568,21.844 h1.52
  text "+" at 1.397,21.717 h1.52
  text "+" at 35.814,21.717 h1.52
  text "+" at 70.231,21.717 h1.52
  text "100" at 20.193,18.796 h1
  text "100" at 54.61,18.796 h1
  text "100" at 89.027,18.796 h1
  text "+" at 30.607,18.161 h1.52
  text "+" at 65.024,18.161 h1.52
  text "+" at 99.441,18.161 h1.52
  text "-" at 1.651,17.399 h1.52
  text "-" at 36.068,17.399 h1.52
  text "-" at 70.485,17.399 h1.52
  text "100" at 20.193,16.637 h1
  text "100" at 54.61,16.637 h1
  text "100" at 89.027,16.637 h1
  text "100K" at 10.541,16.256 h1.5
  text "100K" at 44.958,16.256 h1.5
  text "100K" at 79.375,16.256 h1.5
  text "-" at 30.607,15.875 h1.52
  text "-" at 65.024,15.875 h1.52
  text "-" at 99.441,15.875 h1.52
  text "+" at 1.524,15.621 h1.52
  text "+" at 35.941,15.621 h1.52
  text "+" at 70.358,15.621 h1.52
  text "100" at 20.193,14.351 h1
  text "100" at 54.61,14.351 h1
  text "100" at 89.027,14.351 h1
  text "+" at 30.607,12.319 h1.52
  text "+" at 65.024,12.319 h1.52
  text "+" at 99.441,12.319 h1.52
  text "100" at 20.193,11.811 h1
  text "100" at 54.61,11.811 h1
  text "100" at 89.027,11.811 h1
  text "-" at 1.524,11.049 h1.52
  text "-" at 35.941,11.049 h1.52
  text "-" at 70.358,11.049 h1.52
  text "LDR" at 11.811,10.541 h1.1
  text "LDR" at 46.228,10.541 h1.1
  text "LDR" at 80.645,10.541 h1.1
  text "-" at 30.607,9.906 h1.52
  text "-" at 65.024,9.906 h1.52
  text "-" at 99.441,9.906 h1.52
  text "1k" at 21.082,9.398 h1
  text "1k" at 55.499,9.398 h1
  text "1k" at 89.916,9.398 h1
  text "+" at 1.524,9.017 h1.52
  text "+" at 35.941,9.017 h1.52
  text "+" at 70.358,9.017 h1.52
  text "7mm LDR" at 11.557,7.493 h1
  text "7mm LDR" at 45.974,7.493 h1
  text "7mm LDR" at 80.391,7.493 h1
  text "+" at 29.591,6.985 h1.52
  text "+" at 64.008,6.985 h1.52
  text "+" at 98.425,6.985 h1.52
  text "A.I. PCB" at 1.143,6.223 h1.2
  text "A.I. PCB" at 35.56,6.223 h1.2
  text "A.I. PCB" at 69.977,6.223 h1.2
  text "9V" at 28.067,2.667 h1.52 r90
  text "9V" at 62.484,2.667 h1.52 r90
  text "9V" at 96.901,2.667 h1.52 r90
  text "-" at 14.732,1.524 h1.52
  text "-" at 49.149,1.524 h1.52
  text "-" at 83.566,1.524 h1.52
  text "-" at 8.636,1.397 h1.52
  text "-" at 43.053,1.397 h1.52
  text "-" at 77.47,1.397 h1.52
  text "-" at 21.082,1.27 h1.52
  text "-" at 55.499,1.27 h1.52
  text "-" at 89.916,1.27 h1.52
  text "+" at 10.922,1.143 h1.52
  text "+" at 17.018,1.143 h1.52
  text "+" at 23.241,1.143 h1.52
  text "+" at 45.339,1.143 h1.52
  text "+" at 51.435,1.143 h1.52
  text "+" at 57.658,1.143 h1.52
  text "+" at 79.756,1.143 h1.52
  text "+" at 85.852,1.143 h1.52
  text "+" at 92.075,1.143 h1.52
  text "-" at 29.718,0.381 h1.52
  text "-" at 64.135,0.381 h1.52
  text "-" at 98.552,0.381 h1.52
Bottom Overlay:
  text "A.I. PCB" at 27.178,75.311 h2
  text "A.I. PCB" at 61.595,75.311 h2
  text "A.I. PCB" at 96.012,75.311 h2
  text "A.I. PCB" at 27.178,40.767 h2
  text "A.I. PCB" at 61.595,40.767 h2
  text "A.I. PCB" at 96.012,40.767 h2
  text "A.I. PCB" at 27.051,6.604 h2
  text "A.I. PCB" at 61.468,6.604 h2
  text "A.I. PCB" at 95.885,6.604 h2